# Altium PCB PCB1.PcbDoc
Units mm, origin at the board's own origin, x right, y up, seen from the top; angles counter-clockwise.
Board outline 28.83 x 28 mm, 2 copper layers (Top Layer, Bottom Layer); 5 components, 7 nets, 28 pads, 6 vias.
Unrouted connection lines stored in the file: 1.
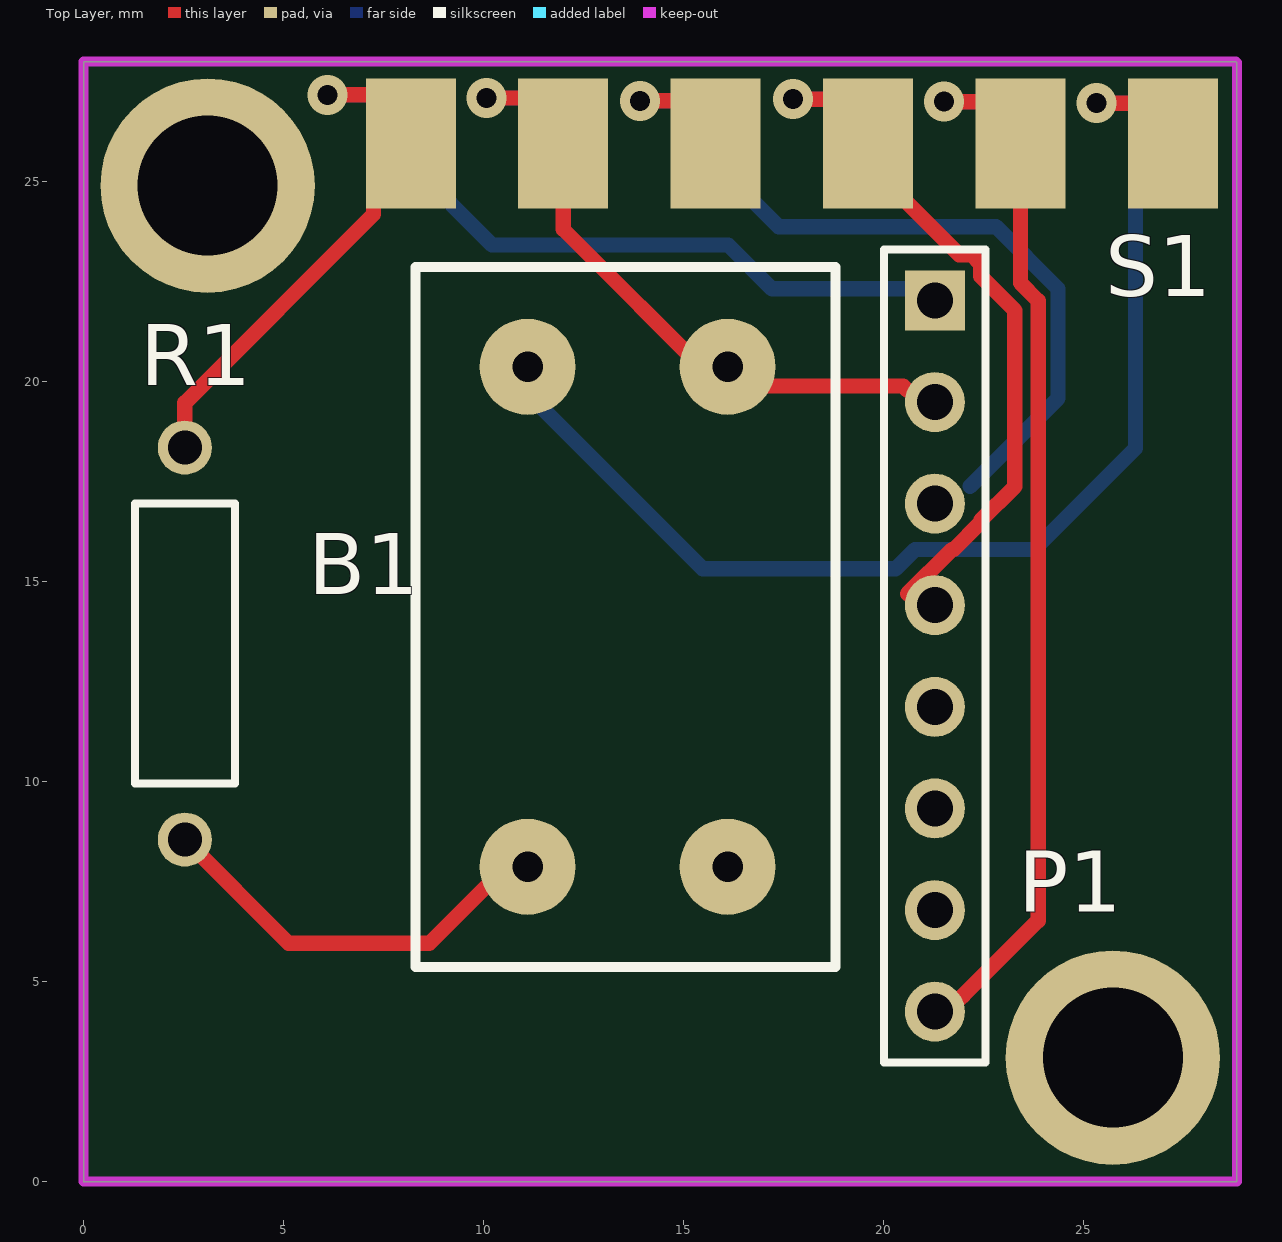
[diagram p0: Top Layer view]
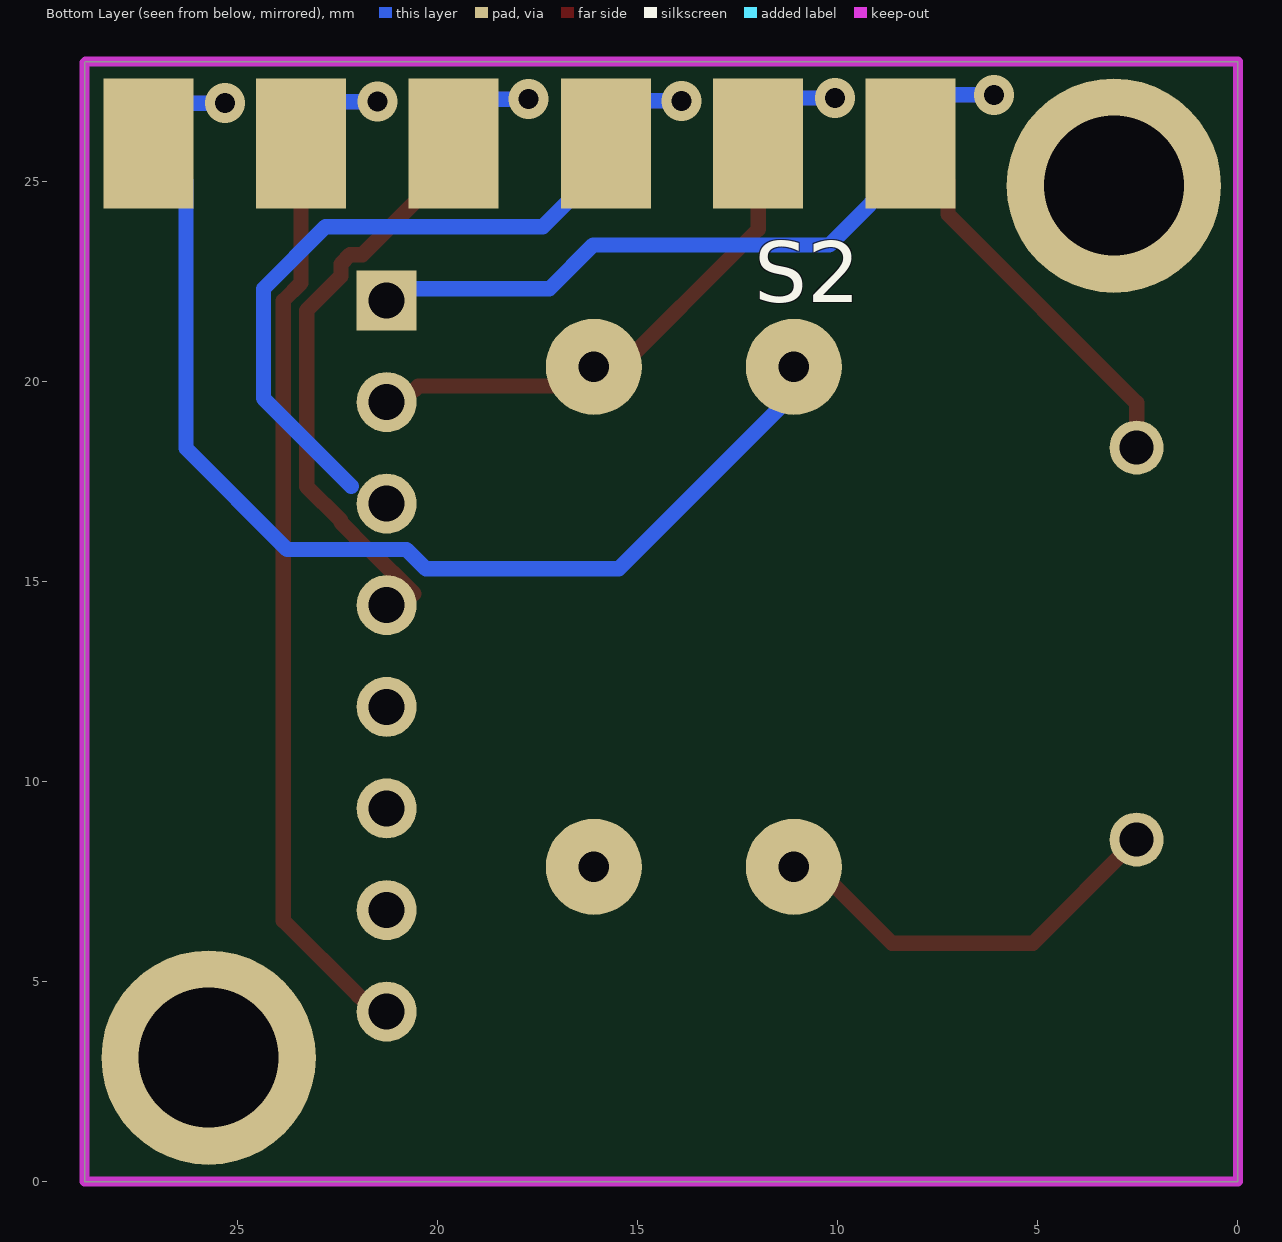
[diagram p1: Bottom Layer view, seen from below]

## Layer stack, top to bottom
Top Solder: solder mask 0.0102, Solder Resist, Dk 3.5
Top Layer: signal copper 0.0356
Dielectric 1: dielectric 0.32, FR-4, Dk 4.8
Bottom Layer: signal copper 0.0356
Bottom Solder: solder mask 0.0102, Solder Resist, Dk 3.5

## Board outline
0,0 0,28 28.81,28 28.83,27.98 28.83,0 28,0

## Design rules (kind name [scope] priority, off if disabled: settings)
BoardOutlineClearance [All] p1: gap=0.2 ignorepadtopadclearanceinfootprint=FALSE except(0.4: Arc-SplitBarrior Arc-SplitContinuation Track-SplitBarrior Track-SplitContinuation SMDPad-SplitBarrior SMDPad-SplitContinuation THPad-SplitBarrior THPad-SplitContinuation Via-SplitBarrior Via-SplitContinuation Fill-SplitBarrior Fill-SplitContinuation Poly-SplitBarrior Poly-SplitContinuation Region-SplitBarrior Region-SplitContinuation Text-SplitBarrior Text-SplitContinuation)
Clearance "Clearance Bottom Layer" [OnLayer('Bottom Layer')] p1: gap=0.203 ignorepadtopadclearanceinfootprint=TRUE except(0.254: Arc-Text Track-Text SMDPad-Text THPad-Text Via-Text Fill-Text Poly-Text Region-Text Text-Text)
Clearance "Clearance Top Layer" [OnLayer('Top Layer')] p2: gap=0.203 ignorepadtopadclearanceinfootprint=TRUE except(0.254: Arc-Text Track-Text SMDPad-Text THPad-Text Via-Text Fill-Text Poly-Text Region-Text Text-Text)
Clearance [All] p3: gap=0.2 ignorepadtopadclearanceinfootprint=FALSE except(0.089: Arc-Arc Arc-Track Arc-SMDPad Track-Track Track-SMDPad SMDPad-SMDPad; 0.127: Arc-Via Track-Via SMDPad-Via THPad-Via Via-Via; 0.254: Arc-Text Track-Text SMDPad-Text THPad-Text Via-Text Fill-Text Poly-Text Region-Text Text-Text)
HoleSize [All] p1: absolutevalues=TRUE maxlimit=6.3 minlimit=0.2 maxpercent=80.000 minpercent=20.000
MinimumAnnularRing [All] p1: minimumring=0.076
MinimumSolderMaskSliver [All] p1: minsoldermaskwidth=0.1
PolygonConnect PolygonConnect_1 [All] p1: thpad.connectstyle=Relief thpad.reliefconductorwidth=0.508 thpad.reliefentries=4 thpad.polygonreliefangle="90 Angle" thpad.airgapwidth=0.254 smdpad.connectstyle=Relief smdpad.reliefconductorwidth=0.508 smdpad.reliefentries=4 smdpad.polygonreliefangle="90 Angle" smdpad.airgapwidth=0.254 via.connectstyle=Direct via.reliefconductorwidth=0.508 via.reliefentries=4 via.polygonreliefangle="90 Angle" via.airgapwidth=0.254
RoutingCorners [All] p1: cornerstyle=Round minsetback=2.54 maxsetback=2.54
RoutingVias [All] p1: holewidth=0.5 width=1 viastyle="Through Hole" minholewidth=0.2 minwidth=0.45 maxholewidth=1 maxwidth=2
SilkToSilkClearance [All] p1: silktosilkclearance=0.1
SilkToSolderMaskClearance [IsPad] p1: minsilkscreentomaskgap=0.1 clearancetoexposedcopper=TRUE
SolderMaskExpansion [All] p1: expansion=0.102 istentingtop=FALSE
Width [All] p1: maxlimit=2.54 minlimit=0.089 preferedwidth=0.381
25 further rules are at their usual default settings.

## Components (designator, comment, footprint, x,y, rotation, side; value= is the part's Value field where it differs from the comment)
B1 "Component_1" PCBComponent_1#1 14.1,14.37 r90 top
P1 "Header 8" HDR1X8 21.28,22.03 r270 top
R1 "" OMTE-RES7X2.5-2 2.53,13.45 r90 top
S1 "" PCBComponent_1#2 6.91,24.172 r0 top
S2 "" PCBComponent_1#2 6.91,27.728 r0 bottom

## Footprints (in the part's own frame and the unit in brackets; to place one, negate y for a bottom-side part, rotate by r counter-clockwise, add the part's x,y. Pads: shape width x height; smd on the part's side, far side on the other; paste and mask are expansions set on the pad)
HDR1X8 [mm] "Connector; Header; 8 Position"
  rect 1.5x1.5 hole 0.9: 1(0,0)
  round 1.5 hole 0.9: 2(2.54,0) 3(5.08,0) 4(7.62,0) 5(10.16,0) 6(12.7,0) 7(15.24,0) 8(17.78,0)
  silkscreen extent -1.27,-1.27 19.05,1.27
OMTE-RES7X2.5-2 [mm] "Resistor, Axial; Body 7x2.5mm, Lead Dia. 0.6mm"
  round 1.35 hole 0.85: 1(-4.9,0) 2(4.9,0)
  silkscreen extent -3.5,-1.25 3.5,1.25, body extent -3.5,-1.25 3.5,1.25, height 2.5
PCBComponent_1#1 [mm]
  round 2.4 hole 0.762: 1(-6.5,3) 2(6,3) 3(-6.5,-2) 4(6,-2)
  silkscreen extent -9,-4.7 8.5,5.8
PCBComponent_1#2 [mm]
  rect 2.25x3.25 smd: 1(1.27,1.778) 2(5.08,1.778) 3(8.89,1.778) 4(12.7,1.778) 5(16.51,1.778) 6(20.32,1.778)

## Part data
P1: "Header, 8-Pin", LatestRevisionDate=17-Jul-2002, LatestRevisionNote="Re-released for DXP Platform.", Publisher="Altium Limited"
R1: library part CMP-2000-06865-1, "Little Demon(R) Carbon Composition Molded OD Series, 250 V, 10 KOhm, +/-5%, -70 to 130 degC, 2-Pin THD, RoHS, Bulk", Manufacturer=Ohmite, Operating Temperature=-, Package / Case=Axial, Package Description="2-Pin THD Resistor, Body 7 x 2.5 mm, Lead Dia. 0.6 mm", Package Reference=RES7X2.5, PartNumber=OD103JE, Power (Watts)=0.25W,1/4W, Power Rating=0.25W, Resistance (Ohms)=10k, Standard Package=100, Tolerance=±5%, Catalog Drawings=OD,OF,OASeries, Category=Resistors, Composition=CarbonComposition, Datasheet URL=http://www.ohmite.com/cat/res_od_of_oa.pdf, Datasheet Version=06/2016, EDA / CAD Models=DownloadfromAcceleratedDesigns, Family=ThroughHoleResistors, Features=PulseWithstanding, Height=-, Manufacturer URL=http://www.ohmite.com/, Mounting Technology=ThroughHole, Number of Terminations=2, Online Catalog=OD,OF,OASeries,LittleDemon®, Packaging=Bulk, RoHS Information="LittleDemon\"E\"SeriesMaterialDeclaration", Series=LittleDemon®OD, Size / Dimension="0.098\"Diax0.276\"L(2.50mmx7.00mm)", Supplier Device Package=Axial, Temperature Coefficient=-
S1 S2: library part Component_1

## Free pads (board coordinates)
  round 5.36 hole 3.5: 1(3.1,24.9) 4(25.73,3.1)

## Via types
v1: diameter 1, hole 0.5, Top Layer to Bottom Layer, 6 vias

## Nets (pads, with @x,y where several pads share a name; then routed paths per layer and width w, separated by ;. In a path a pad name is that pad's centre, name@x,y a point inside that pad or via, vN(x,y) a via of type N, cw(c..) or ccw(c..) an arc to the next point about the centre after c; other vN are vias at no path point)
+5: P1.1 R1.2 S1.1 S2.1 | length 29.7
  Top Layer w0.381: R1.2 2.53,19.47 7.245,24.185 7.245,25.015 S1.1 8.18,26.235 7.245,27.17 v1(6.1,27.17)
  Bottom Layer w0.381: v1(6.1,27.17) 7.245,27.17 8.18,26.235 S2.1 8.18,25.45 10.212,23.418 16.116,23.418 17.214,22.32 P1.1@20.6,22.32
GND: B1.4 P1.2 S1.2 S2.2 | length 17.4
  Top Layer w0.381: v1(10.07,27.09) 11.055,27.09 11.99,26.155 S1.2 11.99,23.81 15.8,20 15.91,19.89 20.49,19.89 P1.2@20.6,19.78
  Bottom Layer w0.381: v1(10.07,27.09) 11.055,27.09 11.99,26.155 S2.2
NetB1_1: B1.1 R1.1 | length 10.7
  Top Layer w0.381: R1.1 5.12,5.96 8.643,5.96 10.167,7.484 11.133,7.484 B1.1@11.397,7.22
NetB1_2: B1.2 S1.6 S2.6 | length 31.4
  Top Layer w0.381: v1(25.32,26.96) 26.295,26.96 27.23,26.025 S1.6
  Bottom Layer w0.381: B1.2@10.8,20 15.48,15.32 20.297,15.32 20.784,15.806 23.766,15.806 26.295,18.336 26.295,25.015 S2.6 27.23,26.025 26.295,26.96 v1(25.32,26.96)
NetP1_3: P1.3 S1.3 S2.3 | length 21
  Top Layer w0.381: v1(13.91,27.02) 14.865,27.02 15.8,26.085 S1.3
  Bottom Layer w0.381: v1(13.91,27.02) 14.865,27.02 15.8,26.085 S2.3 15.8,25.45 17.376,23.874 22.807,23.874 24.36,22.322 24.36,19.582 22.162,17.383
NetP1_4: P1.4 S1.4 S2.4 | length 19
  Top Layer w0.381: v1(17.73,27.06) 18.675,27.06 19.61,26.125 S1.4 19.61,25.45 21.886,23.174 22.193,23.174 22.424,22.943 22.424,22.636 23.28,21.78 23.28,17.38 22.424,16.524 22.424,16.476 21.754,15.806 21.706,15.806 P1.4@20.6,14.7
  Bottom Layer w0.381: v1(17.73,27.06) 18.675,27.06 19.61,26.125 S2.4
NetP1_8: P1.8 S1.5 S2.5 | length 28
  Top Layer w0.381: P1.8@21.342,4.002 21.342,4.01 21.981,4.648 21.988,4.648 23.864,6.524 23.864,22.022 23.42,22.466 23.42,26.065 22.485,27 v1(21.51,27)
  Bottom Layer w0.381: v1(21.51,27) 22.485,27 23.42,26.065 S2.5
pads on no net: B1.3 P1.5 P1.6 P1.7

## Keep-outs
Keep-Out Layer:
  lines w0.254: 0,0 0,28 28,28 28.81,28 28.83,27.98 28.83,15.23 28.83,0 28,0 0,0